# EAGLE board CT_schematic (EAGLE 7.6.0)

Size 100 x 80 mm. Coordinates in mm from the lower left corner, seen from the top.
Outline: 0,0 100,0 100,80 0,80 0,0
Copper layers (1*16): Top 0.035mm / dielectric 1.5mm / Bottom 0.035mm
Design rules "default": minimum track width 10mil, minimum drill 24mil, track to track 8mil, track to pad 8mil, pad to pad 8mil, via to via 8mil, smd to smd 8mil, copper to edge 40mil, drill to drill 8mil, minimum pad ring 10mil, minimum via ring 8mil, stop-mask expansion 4mil, vias tented up to drill 0mil, thermal gap 10mil

## Footprints (pad centres in the part's own frame; a part is rotated, then mirrored left to right if it is on the bottom)
C0603 = smd 0.8 x 0.8: 1 -0.762,0; 2 0.762,0
C0402 = smd 0.5 x 0.5: 1 -0.508,0; 2 0.508,0
EXV-9B = smd 2.718 x 1.778: 1 -2.108,0; 2 2.108,0
EXV-9H = smd 3.505 x 1.676: 1 -2.857,0; 2 2.857,0
L0603 = smd 0.8 x 0.8: 1 -0.762,0; 2 0.762,0
PJ-037B_PACKAGE = drill 3.7 square: 1 12,0 | drill 3.2 square: 2 6,0
R0603 = smd 0.8 x 0.8: 1 -0.762,0; 2 0.762,0
UFQFPN32 = smd 0.6 x 0.3: 1 -2.35,1.75; 2 -2.35,1.25; 3 -2.35,0.75; 4 -2.35,0.25; 5 -2.35,-0.25; 6 -2.35,-0.75; 7 -2.35,-1.25; 8 -2.35,-1.75; 17 2.35,-1.75; 18 2.35,-1.25; 19 2.35,-0.75; 20 2.35,-0.25; 21 2.35,0.25; 22 2.35,0.75; 23 2.35,1.25; 24 2.35,1.75 | smd 0.3 x 0.6: 9 -1.75,-2.35; 10 -1.25,-2.35; 11 -0.75,-2.35; 12 -0.25,-2.35; 13 0.25,-2.35; 14 0.75,-2.35; 15 1.25,-2.35; 16 1.75,-2.35; 25 1.75,2.35; 26 1.25,2.35; 27 0.75,2.35; 28 0.25,2.35; 29 -0.25,2.35; 30 -0.75,2.35; 31 -1.25,2.35; 32 -1.75,2.35 | smd 3.45 x 3.45: EPAD 0,0
SOIC-8 = smd 1.6 x 0.6: 1 -2.7,1.905 | smd 1.55 x 0.6: 2 -2.7,0.635; 3 -2.7,-0.635; 4 -2.7,-1.905; 5 2.7,-1.905; 6 2.7,-0.635; 7 2.7,0.635; 8 2.7,1.905
ABS07-32.768KHZ-7-T = smd 1.1 x 2.4: 1 -2.5,0; 2 0,0
LP2954 = smd 1.6 x 0.6: 1 -2.475,1.905 | smd 1.55 x 0.6: 2 -2.475,0.635; 3 -2.475,-0.635; 4 -2.475,-1.905; 5 2.475,-1.905; 6 2.475,-0.635; 7 2.475,0.635; 8 2.475,1.905
SON-6 = smd 0.55 x 0.3: 1 -0.355,0.5 | smd 0.52 x 0.3: 2 -0.37,0; 3 -0.37,-0.5; 4 0.37,-0.5; 5 0.37,0; 6 0.37,0.5
SW_4-1437565-2 = smd 1.4 x 2.1: 1 -2.23,4.55; 2 -2.23,-4.55; 3 2.23,4.55; 4 2.23,-4.55
LGM67K-G1J2-24-Z = smd 0.8 x 1.4: A -2,0; C 0,0
NC7SZ125M5X = smd 1.3 x 0.7: 1 -1.3,0.95; 2 -1.3,0; 3 -1.3,-0.95; 4 1.3,-0.95; 5 1.3,0.95
DUMMY_PACKAGE_90 = drill 0.3: 1 0,-1; 2 1.5,-1; 3 3,-1

## Placement (x,y rotation side)
C1  1e-07  [C0603]  -15.24,55.88 0 top  (outside the outline)
C2  1e-07  [C0603]  -19.05,55.88 0 top  (outside the outline)
C3  1e-07  [C0603]  -22.86,55.88 0 top  (outside the outline)
C4  1e-07  [C0603]  -26.67,55.88 0 top  (outside the outline)
C5  4.7e-06  [C0603]  -54.61,50.8 0 top  (outside the outline)
C6  1e-07  [C0603]  -30.48,55.88 0 top  (outside the outline)
C7  1e-08  [C0603]  -34.29,55.88 0 top  (outside the outline)
C8  1e-06  [C0603]  -38.1,55.88 0 top  (outside the outline)
C9  1e-11  [C0402]  -15.24,60.96 0 top  (outside the outline)
C10  1e-11  [C0402]  -19.05,60.96 0 top  (outside the outline)
C11  1e-08  [C0402]  -22.86,60.96 0 top  (outside the outline)
C12  1e-06  [EXV-9B]  -49.53,36.83 0 top  (outside the outline)
C13  2.2e-06  [EXV-9B]  -16.51,44.45 0 top  (outside the outline)
C14  1e-07  [C0402]  -26.67,60.96 0 top  (outside the outline)
C15  0.0001  [EXV-9H]  -33.02,27.94 0 top  (outside the outline)
C16  0.0001  [EXV-9H]  -44.45,27.94 0 top  (outside the outline)
C17  1e-08  [C0402]  -30.48,60.96 0 top  (outside the outline)
F1  240.0  [L0603]  -41.91,55.88 0 top  (outside the outline)
J1  PJ-037B  [PJ-037B_PACKAGE]  -27.94,7.62 0 top  (outside the outline)
R1  10000.0  [R0603]  -55.88,44.45 0 top  (outside the outline)
R2  1000.0  [R0603]  -45.72,55.88 0 top  (outside the outline)
R3  910.0  [R0603]  -49.53,55.88 0 top  (outside the outline)
R4  4700.0  [R0603]  -53.34,55.88 0 top  (outside the outline)
R5  10000.0  [R0603]  -15.24,50.8 0 top  (outside the outline)
R6  10000.0  [R0603]  -20.32,50.8 0 top  (outside the outline)
R7  10000.0  [R0603]  -25.4,50.8 0 top  (outside the outline)
R8  10000.0  [R0603]  -30.48,50.8 0 top  (outside the outline)
R9  100000.0  [R0603]  -30.48,44.45 0 top  (outside the outline)
R10  100000.0  [R0603]  -35.56,44.45 0 top  (outside the outline)
R11  47000.0  [R0603]  -35.56,50.8 0 top  (outside the outline)
R12  100000.0  [R0603]  -40.64,44.45 0 top  (outside the outline)
R13  10000.0  [R0603]  -40.64,50.8 0 top  (outside the outline)
R14  10000.0  [R0603]  -45.72,50.8 0 top  (outside the outline)
R15  82000.0  [R0603]  -50.8,50.8 0 top  (outside the outline)
R16  300000.0  [R0603]  -45.72,44.45 0 top  (outside the outline)
R17  120000.0  [R0603]  -50.8,44.45 0 top  (outside the outline)
U1  STM32L071K8U6  [UFQFPN32]  -24.13,19.05 0 top  (outside the outline)
U2  AT25512N-SH-T  [SOIC-8]  -22.86,29.21 0 top  (outside the outline)
U3  ABS07-32.768KHZ-7-T  [ABS07-32.768KHZ-7-T]  -27.94,38.1 0 top  (outside the outline)
U4  LP2954AIMX/NOPB  [LP2954]  -40.64,19.05 0 top  (outside the outline)
U5  TPS3895ADRYR  [SON-6]  -39.37,59.69 0 top  (outside the outline)
U6  4-1437565-2  [SW_4-1437565-2]  -44.45,6.35 0 top  (outside the outline)
U7  Q65110A2395  [LGM67K-G1J2-24-Z]  -36.83,36.83 0 top  (outside the outline)
U8  nc7sz125m5x  [NC7SZ125M5X]  -24.13,44.45 0 top  (outside the outline)
U9  Dummy  [DUMMY_PACKAGE_90]  -36.83,60.96 0 top  (outside the outline)

## Library data of the parts
C1-C17 F1 J1 R1-R17 U1-U9 = circuit_tree

## Nets
CLK_CRYSTAL_U1_1: C9.1 U1.1 U3.1
CLK_CRYSTAL_U1_2: C10.1 U1.2 U3.2
GND: C1.2 C2.2 C3.2 C4.2 C5.2 C6.2 C7.2 C8.2 C9.2 C10.2 C11.2 C12.2 C13.2 C14.2 C15.2 C16.2 C17.2 J1.2 R2.2 R5.2 R12.2 R15.2 R17.2 U1.4 U1.16 U1.31 U1.EPAD U2.4 U4.4 U5.2 U7.C U8.1 U8.3 U9.1
NET_U1_3: R4.1 U1.3 U8.4
NET_U1_5: C7.1 C8.1 F1.1 U1.5
NET_U1_28: R3.1 U1.28 U7.A
NET_U1_29: R1.1 U1.29 U6.3 U6.4
NET_U1_30: R5.1 U1.30
NET_U2_3: R6.1 U2.3
NET_U2_7: R8.1 U2.7
NET_U4_3: R10.1 U4.3
NET_U4_5: R9.1 U4.5
NET_U4_7: R11.2 R12.1 U4.7
NET_U5_1: R14.1 R15.1 U5.1
NET_U5_3: R16.2 R17.1 U5.3
NET_U5_4: R13.1 U5.4 U8.2
NET_U6_1: R2.1 U6.1 U6.2
PROC_ADC_IN1: U1.7 U9.3
PROC_ADC_IN9: U1.15 U9.2
PROC_SPI1_MISO: U1.12 U2.2
PROC_SPI1_MOSI: U1.13 U2.5
PROC_SPI1_NSS: R7.1 U1.10 U2.1
PROC_SPI1_SCK: U1.11 U2.6
VCC_S1_16V2: C12.1 C15.1 C16.1 J1.1 R10.2 U4.8
VCC_TIER1_1V8: C1.1 C2.1 C3.1 C4.1 C5.1 C6.1 C11.1 C13.1 C14.1 C17.1 F1.2 R1.2 R3.2 R4.2 R6.2 R7.2 R8.2 R9.2 R11.1 R13.2 R14.2 R16.1 U1.17 U1.24 U1.32 U2.8 U4.1 U5.6 U8.5

## Tracks (layer width: path | path; a pad name or v marks a point on that pad's centre or on a via)
CLK_CRYSTAL_U1_1  (2 unrouted)
CLK_CRYSTAL_U1_2  (2 unrouted)
GND  (33 unrouted)
NET_U1_3  (2 unrouted)
NET_U1_5  (3 unrouted)
NET_U1_28  (2 unrouted)
NET_U1_29  (3 unrouted)
NET_U1_30  (1 unrouted)
NET_U2_3  (1 unrouted)
NET_U2_7  (1 unrouted)
NET_U4_3  (1 unrouted)
NET_U4_5  (1 unrouted)
NET_U4_7  (2 unrouted)
NET_U5_1  (2 unrouted)
NET_U5_3  (2 unrouted)
NET_U5_4  (2 unrouted)
NET_U6_1  (2 unrouted)
PROC_ADC_IN1  (1 unrouted)
PROC_ADC_IN9  (1 unrouted)
PROC_SPI1_MISO  (1 unrouted)
PROC_SPI1_MOSI  (1 unrouted)
PROC_SPI1_NSS  (2 unrouted)
PROC_SPI1_SCK  (1 unrouted)
VCC_S1_16V2  (5 unrouted)
VCC_TIER1_1V8  (28 unrouted)